# EAGLE board neww (EAGLE 6.2)
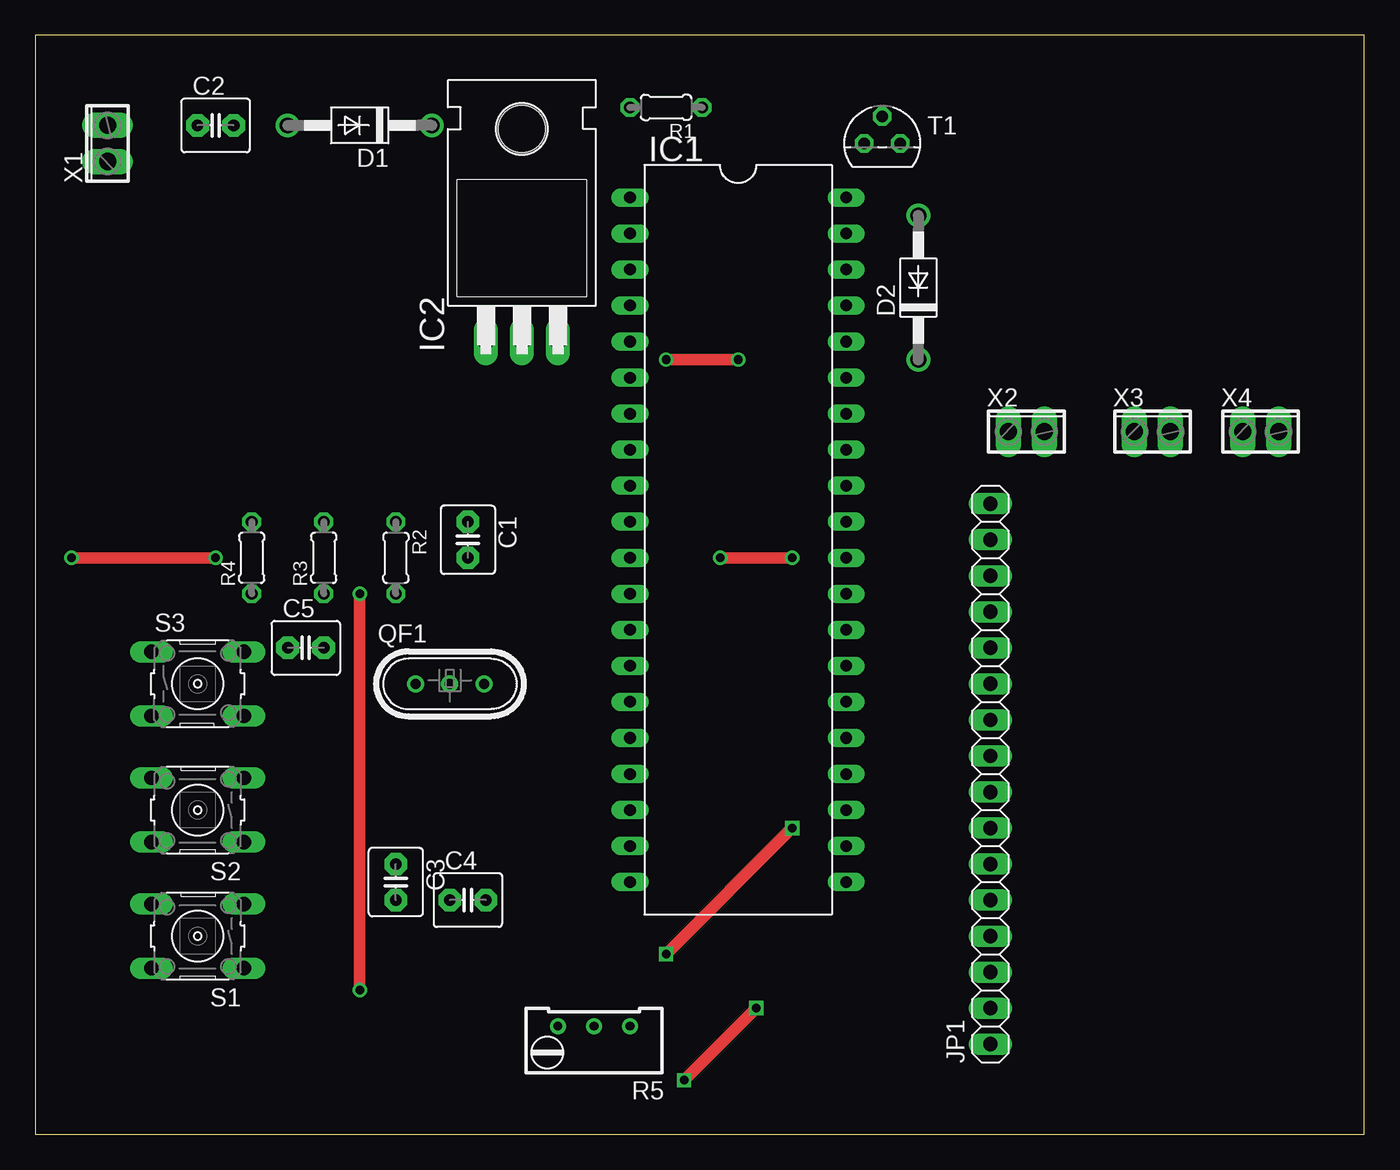
[diagram p0: board, top side]
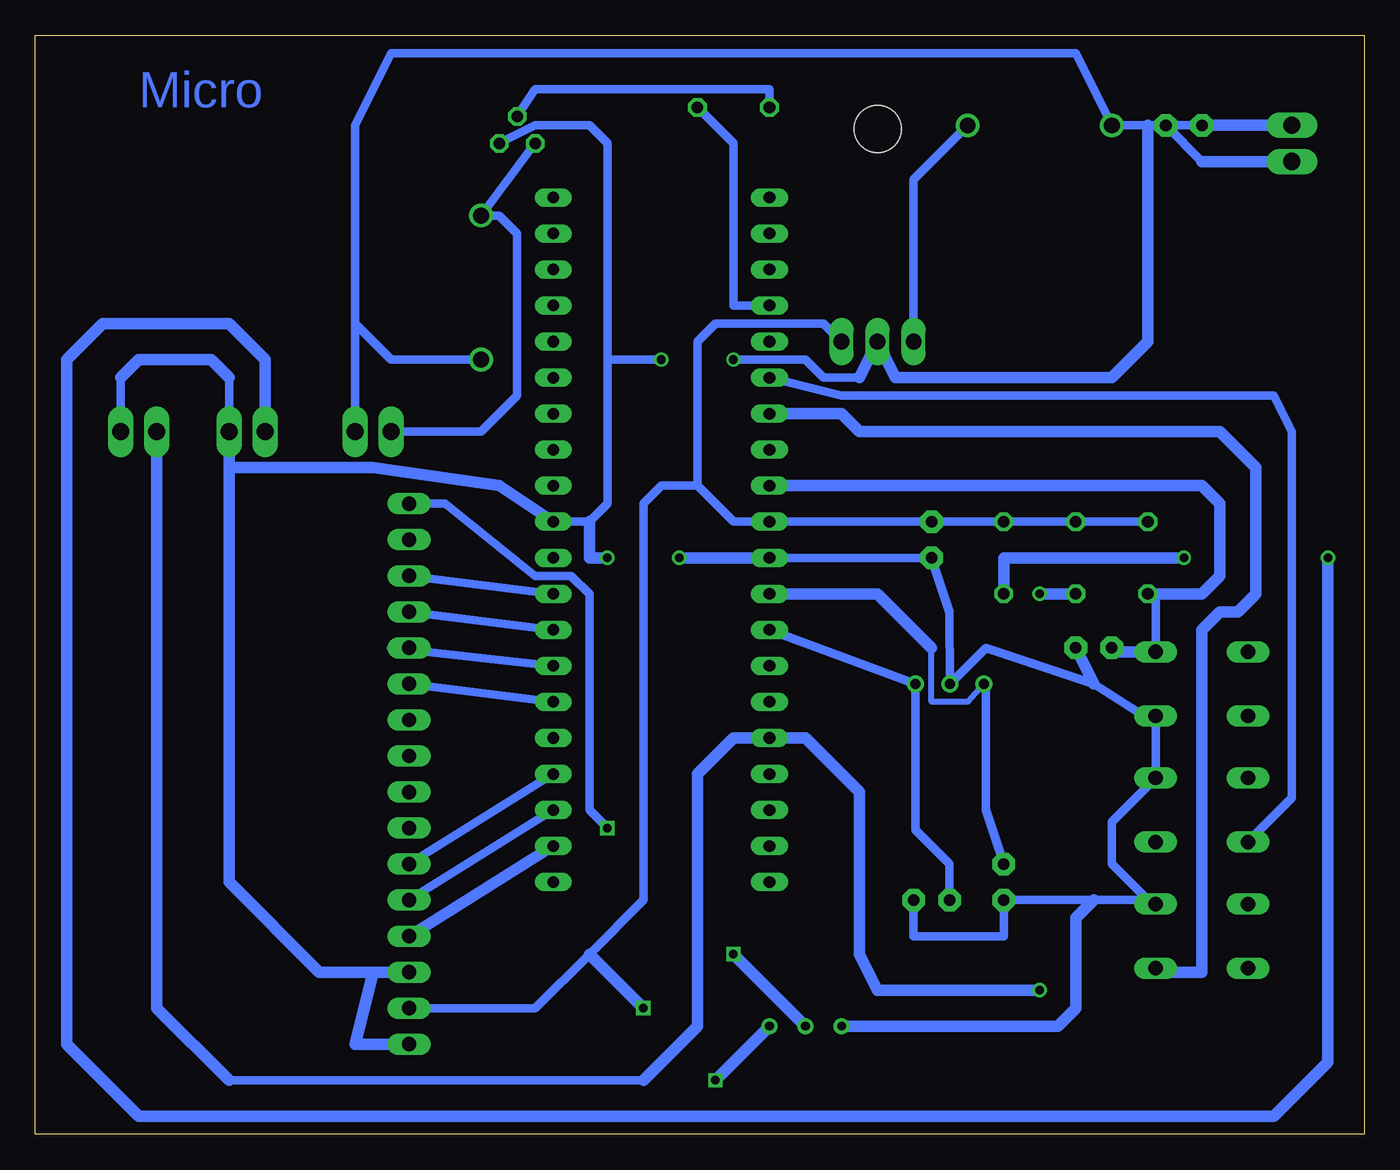
[diagram p1: board, bottom side, seen from below]

Size 93.65 x 77.46 mm. Coordinates in mm from the lower left corner, seen from the top.
Outline: 0,0 93.65,0 93.65,77.46 0,77.46 0,0
Copper layers (1*16): Top 0.035mm / dielectric 1.5mm / Bottom 0.035mm
Design rules: minimum track width 10mil, minimum drill 24mil, track to track 8mil, track to pad 8mil, pad to pad 8mil, via to via 8mil, smd to smd 8mil, copper to edge 40mil, drill to drill 8mil, minimum pad ring 10mil, minimum via ring 8mil, stop-mask expansion 4mil, vias tented up to drill 0mil, thermal gap 10mil

## Footprints (pad centres in the part's own frame; a part is rotated, then mirrored left to right if it is on the bottom)
C2.5-4 = drill 0.813 pad 1.6 octagon: 1 -1.27,0; 2 1.27,0
DO41-10 = drill 1.118: A 5.08,0; C -5.08,0
DIL40 = drill 0.813 long: 1 -24.13,-7.62; 2 -21.59,-7.62; 3 -19.05,-7.62; 4 -16.51,-7.62; 5 -13.97,-7.62; 6 -11.43,-7.62; 7 -8.89,-7.62; 8 -6.35,-7.62; 9 -3.81,-7.62; 10 -1.27,-7.62; 11 1.27,-7.62; 12 3.81,-7.62; 13 6.35,-7.62; 14 8.89,-7.62; 15 11.43,-7.62; 16 13.97,-7.62; 17 16.51,-7.62; 18 19.05,-7.62; 19 21.59,-7.62; 20 24.13,-7.62; 21 24.13,7.62; 22 21.59,7.62; 23 19.05,7.62; 24 16.51,7.62; 25 13.97,7.62; 26 11.43,7.62; 27 8.89,7.62; 28 6.35,7.62; 29 3.81,7.62; 30 1.27,7.62; 31 -1.27,7.62; 32 -3.81,7.62; 33 -6.35,7.62; 34 -8.89,7.62; 35 -11.43,7.62; 36 -13.97,7.62; 37 -16.51,7.62; 38 -19.05,7.62; 39 -21.59,7.62; 40 -24.13,7.62
TO220H = drill 1.118 long: 1 -2.54,-10.16; 2 0,-10.16; 3 2.54,-10.16 | hole 3.302: 0,4.826
1X16 = drill 1.016 long: 1 -19.05,0; 2 -16.51,0; 3 -13.97,0; 4 -11.43,0; 5 -8.89,0; 6 -6.35,0; 7 -3.81,0; 8 -1.27,0; 9 1.27,0; 10 3.81,0; 11 6.35,0; 12 8.89,0; 13 11.43,0; 14 13.97,0; 15 16.51,0; 16 19.05,0
HC49U = drill 0.7 pad 1.2: 1 -2.413,0; 2 -0.027,0; 3 2.413,0
0204/5 = drill 0.813 octagon: 1 -2.54,0; 2 2.54,0
RTRIM64W = drill 0.61: 1 1.27,-2.54; 2 1.27,0; 3 1.27,2.54
B3F-10XX = drill 1.016 long: 1 -3.251,2.261; 2 3.251,2.261; 3 -3.251,-2.261; 4 3.251,-2.261
TO92 = drill 0.813 octagon: 1 1.27,0; 2 0,1.905; 3 -1.27,0
2POL254 = drill 1.2 long: 1 -1.27,0; 2 1.27,0

## Placement (x,y rotation side)
C1  100n  [C2.5-4]  30.48,41.91 270 top
C2  100n  [C2.5-4]  12.7,71.12 0 top
C3  100n  [C2.5-4]  25.4,17.78 270 top
C4  100n  [C2.5-4]  30.48,16.51 0 top
C5  100n  [C2.5-4]  19.05,34.29 0 top
D1  1N4004  [DO41-10]  22.86,71.12 180 top
D2  1N4004  [DO41-10]  62.23,59.69 90 top
IC1  MEGA16-P  [DIL40]  49.53,41.91 270 top
IC2  7805T  [TO220H]  34.29,66.04 0 top
JP1  [1X16]  67.31,25.4 90 top
QF1  IXFA  [HC49U]  29.21,31.75 0 top
R1  1k  [0204/5]  44.45,72.39 180 top
R2  330  [0204/5]  25.4,40.64 270 top
R3  10k  [0204/5]  20.32,40.64 90 top
R4  10k  [0204/5]  15.24,40.64 90 top
R5  [RTRIM64W]  39.37,6.35 90 top
S1  5v  [B3F-10XX]  11.43,13.97 180 top
S2  5v  [B3F-10XX]  11.43,22.86 180 top
S3  5v  [B3F-10XX]  11.43,31.75 0 top
T1  BC337  [TO92]  59.69,69.85 0 top
X1  9  [2POL254]  5.08,69.85 90 top
X2  9  [2POL254]  69.85,49.53 0 top
X3  5  [2POL254]  78.74,49.53 0 top
X4  5  [2POL254]  86.36,49.53 0 top

## Library data of the parts
C1-C5 = capacitor-wima
D1 D2 = diode
IC1 = atmel; MPN: ATMEGA16-16PU; OC_FARNELL: 9171142; OC_NEWARK: 01M6885
IC2 = linear
JP1 = pinhead
QF1 = crystal; OC_FARNELL: unknown; OC_NEWARK: unknown
R1-R5 = resistor
S1-S3 = switch-omron; MPN: B3F-1000; OC_FARNELL: 176432; OC_NEWARK: 36M3542
T1 = transistor
X1-X4 = con-phoenix-254; OC_FARNELL: unknown; OC_NEWARK: unknown

## Nets
AVCC: IC1.30
GND: C1.2 C2.2 C3.2 C4.2 C5.2 IC1.11 IC1.31 IC2.2 JP1.1 JP1.3 QF1.2 R5.3 S1.3 S2.3 S3.4 T1.1 X1.1 X3.2 X4.2
N$1: R2.2 X3.1
N$2: D1.C IC2.1
N$3: IC1.6 S2.2
N$4: C1.1 IC1.10 IC2.3 JP1.2 R2.1 R3.2 R4.2 R5.1
N$5: IC1.22 JP1.4
N$6: IC1.23 JP1.5
N$7: IC1.4 R1.1
N$8: IC1.16 R3.1 X4.1
N$9: R1.2 T1.2
N$10: IC1.24 JP1.6
N$11: C5.1 IC1.9 R4.1 S3.2
N$12: D2.A T1.3 X2.1
N$13: IC1.26 JP1.11
N$14: IC1.27 JP1.12
N$15: IC1.28 JP1.13
N$16: IC1.29 JP1.14
N$17: IC1.7 S1.1
N$18: C3.1 IC1.12 QF1.1
N$19: C4.1 IC1.13 QF1.3
N$20: C2.1 D1.A D2.C X1.2 X2.2
N$21: JP1.16 R5.2

## Tracks (layer width: path | path; a pad name or v marks a point on that pad's centre or on a via)
GND  (via drill 0.6)
  Top 0.813: v44.45,54.61 v49.53,54.61 | v48.26,40.64 v53.34,40.64
  Bottom 0.61: 11.43,68.58 C2.2 15.24,71.12 | T1.1 58.42,71.12 54.61,71.12 53.34,69.85 53.34,54.61 | 53.34,54.61 53.34,44.45 54.61,43.18 IC1.31 | C4.2 31.75,13.97 25.4,13.97 C3.2 19.05,16.51 14.96,16.51 S1.3 14.96,16.23 17.78,19.05 17.78,22.02 S2.3 S3.4 15.52,29.49 19.05,31.75 26.64,34.29 QF1.2 29.21,36.83 C1.2 IC1.11 | X4.2 87.63,53.34 | 80.01,53.34 X3.2 | 35.56,53.34 38.1,53.34 39.37,54.61 v44.45,54.61 | v49.53,54.61 53.34,54.61
  Bottom 0.813: IC1.11 v48.26,40.64 | v53.34,40.64 54.61,40.64 54.61,43.18 | 69.85,11.43 71.12,6.35 JP1.1 | JP1.3 69.85,11.43 | 69.85,11.43 73.66,11.43 80.01,17.78 80.01,46.99 | 80.01,46.99 X3.2 | IC1.31 60.96,45.72 69.85,46.99 80.01,46.99 | 15.24,71.12 15.24,55.88 17.78,53.34 33.02,53.34 IC2.2 35.56,53.34 | 80.01,53.34 81.28,54.61 86.36,54.61 87.63,53.34 | X1.1 11.43,68.58 | C5.2 19.05,31.75 | R5.3 21.59,7.62 20.32,8.89 20.32,15.24 19.05,16.51
N$1  (via drill 0.6)
  Top 0.813: v12.7,40.64 v2.54,40.64
  Bottom 0.813: R2.2 25.4,40.64 v12.7,40.64 | v2.54,40.64 2.54,5.08 6.35,1.27 86.36,1.27 91.44,6.35 91.44,54.61 88.9,57.15 80.01,57.15 77.47,54.61 X3.1
N$2
  Bottom 0.61: D1.C 31.75,67.31 IC2.1
N$3
  Bottom 0.61: S2.2 5.08,23.7 5.08,49.53 6.35,52.07 36.83,52.07 IC1.6
N$4  (via drill 0.6)
  Top 0.813: v45.72,3.81 v50.8,8.89
  Bottom 0.61: R4.2 R3.2 R2.1 C1.1 IC1.10 44.45,43.18 46.99,45.72 | IC2.3 38.1,57.15 45.72,57.15 46.99,55.88 46.99,45.72 | JP1.2 58.42,8.89 54.61,12.7 50.8,16.51 50.8,44.45 49.53,45.72 46.99,45.72
  Bottom 0.813: R5.1 v45.72,3.81 | v50.8,8.89 54.61,12.7
N$5
  Bottom 0.813: IC1.22 JP1.4
N$6
  Bottom 0.61: IC1.23 JP1.5
N$7
  Bottom 0.61: R1.1 44.45,69.85 44.45,58.42 IC1.4
N$8  (via drill 0.6)
  Top 0.813: v22.86,10.16 v22.86,38.1
  Bottom 0.61: 50.8,3.81 80.01,3.81
  Bottom 0.813: X4.1 85.09,8.89 80.01,3.81 | 50.8,3.81 46.99,7.62 46.99,25.4 44.45,27.94 IC1.16 39.37,27.94 35.56,24.13 35.56,12.7 34.29,10.16 v22.86,10.16 | v22.86,38.1 R3.1
N$9
  Bottom 0.61: R1.2 41.91,73.66 58.42,73.66 T1.2
N$10
  Bottom 0.61: IC1.24 JP1.6
N$11
  Bottom 0.61: R4.1 14.68,37.54 S3.2
  Bottom 0.813: S3.2 17.5,34.01 C5.1 | R4.1 11.43,38.1 10.16,39.37 10.16,44.45 11.43,45.72 IC1.9
N$12
  Bottom 0.61: T1.3 D2.A 60.96,64.77 59.69,63.5 59.69,52.07 62.23,49.53 X2.1
N$13
  Bottom 0.61: IC1.26 JP1.11
N$14
  Bottom 0.61: IC1.27 68.58,34.29 JP1.12
N$15
  Bottom 0.61: IC1.28 JP1.13
N$16
  Bottom 0.61: IC1.29 JP1.14
N$17
  Bottom 0.813: S1.1 14.4,11.43 11.43,11.43 11.43,35.56 10.16,36.83 8.89,36.83 7.62,38.1 7.62,46.99 10.16,49.53 35.56,49.53 36.83,50.8 IC1.7
N$18
  Bottom 0.406: QF1.1 27.94,30.48 30.48,30.48 30.48,34.29
  Bottom 0.61: C3.1 26.67,22.86 26.67,31.75 QF1.1
  Bottom 0.813: 30.48,34.29 34.29,38.1 IC1.12
N$19
  Bottom 0.61: IC1.13 QF1.3 31.62,21.46 29.21,19.05 C4.1
N$20
  Bottom 0.61: C2.1 D1.A 20.32,76.2 68.58,76.2 71.12,71.12 71.12,57.15 | 71.12,57.15 X2.2 | D2.C 68.58,54.61 71.12,57.15
  Bottom 0.813: X1.2 C2.1
N$21  (via drill 0.6)
  Top 0.813: v44.45,12.7 v53.34,21.59
  Bottom 0.61: v53.34,21.59 54.61,22.86 54.61,38.1 55.88,39.37 58.42,39.37 64.77,44.45 JP1.16
  Bottom 0.813: R5.2 v44.45,12.7

## Text on the board
Bottom: Micro